# EAGLE board SDC project - Mask (EAGLE 9.1.3)
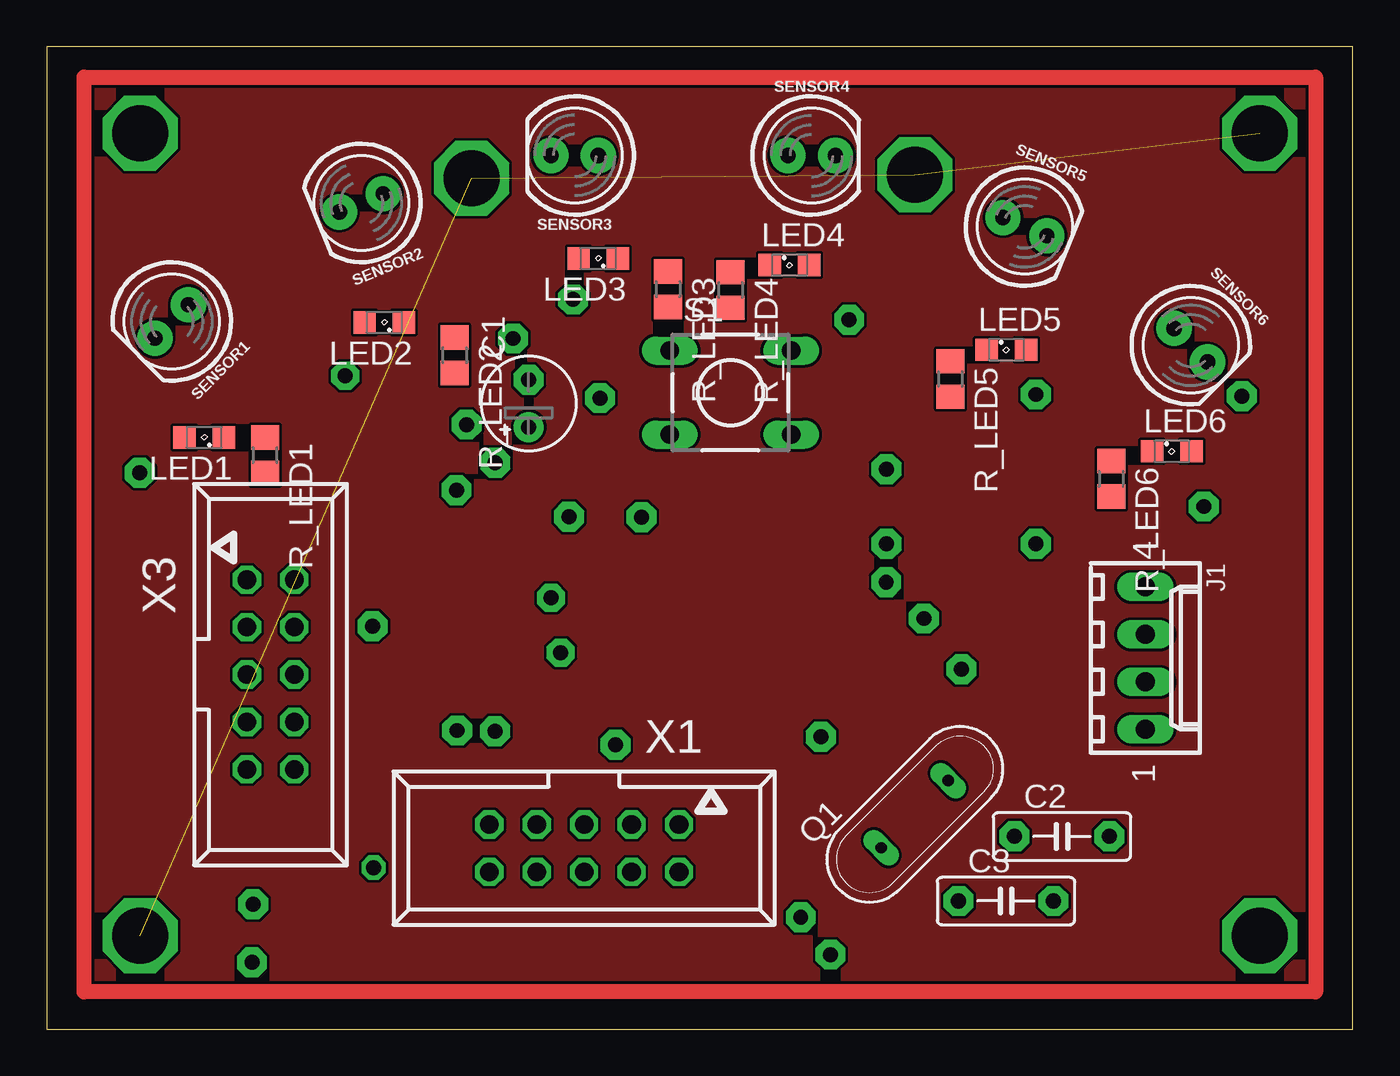
[diagram p0: board, top side]
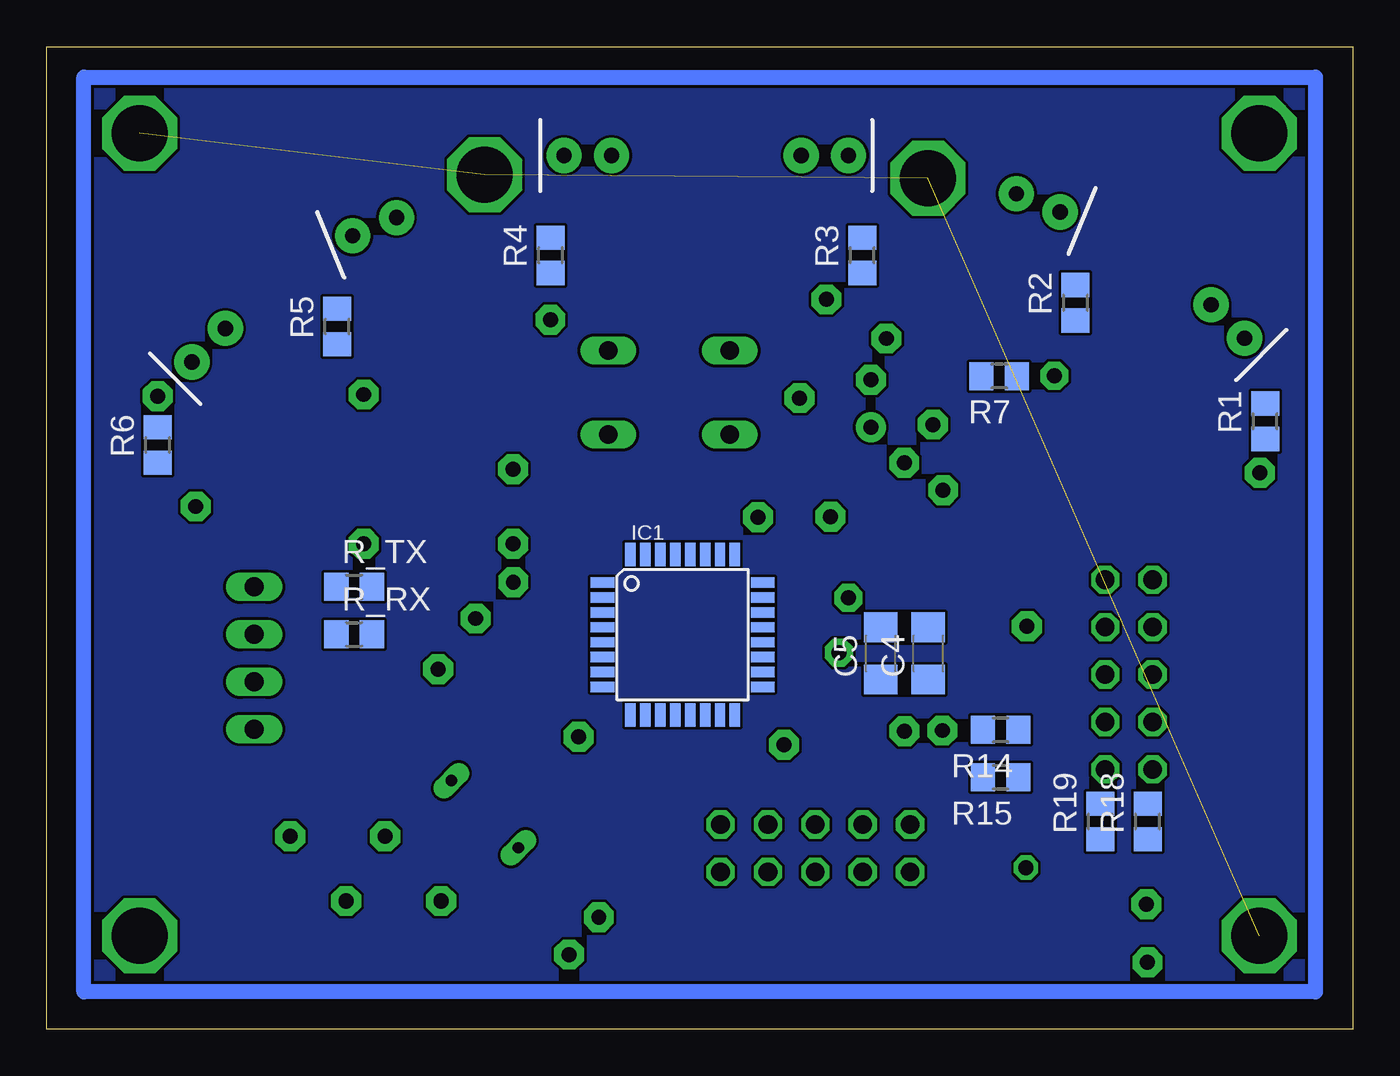
[diagram p1: board, bottom side, seen from below]

Size 69.99 x 52.63 mm. Coordinates in mm from the lower left corner, seen from the top.
Outline: 0,0 69.99,0 69.99,52.63 0,52.63 0,0
Copper layers (1*16): Top 0.035mm / dielectric 1.5mm / Bottom 0.035mm
Design rules "default": minimum track width 6mil, minimum drill 0.35mm, track to track 6mil, track to pad 6mil, pad to pad 6mil, via to via 6mil, smd to smd 6mil, copper to edge 40mil, drill to drill 6mil, minimum pad ring 10mil, minimum via ring 8mil, stop-mask expansion 4mil, vias tented up to drill 0mil, thermal gap 10mil

## Footprints (pad centres in the part's own frame; a part is rotated, then mirrored left to right if it is on the bottom)
E2,5-5 = drill 0.813 pad 1.6: + -1.27,0 | drill 0.813 pad 1.6 octagon: - 1.27,0
C5B2.5 = drill 0.813 pad 1.6 octagon: 1 -2.54,0; 2 2.54,0
C1206 = smd 1.6 x 1.8: 1 -1.4,0; 2 1.4,0
TQFP32-08 = smd 1.27 x 0.559: 1 -4.293,2.8; 2 -4.293,2; 3 -4.293,1.2; 4 -4.293,0.4; 5 -4.293,-0.4; 6 -4.293,-1.2; 7 -4.293,-2; 8 -4.293,-2.8; 17 4.293,-2.8; 18 4.293,-2; 19 4.293,-1.2; 20 4.293,-0.4; 21 4.293,0.4; 22 4.293,1.2; 23 4.293,2; 24 4.293,2.8 | smd 0.559 x 1.27: 9 -2.8,-4.293; 10 -2,-4.293; 11 -1.2,-4.293; 12 -0.4,-4.293; 13 0.4,-4.293; 14 1.2,-4.293; 15 2,-4.293; 16 2.8,-4.293; 25 2.8,4.293; 26 2,4.293; 27 1.2,4.293; 28 0.4,4.293; 29 -0.4,4.293; 30 -1.2,4.293; 31 -2,4.293; 32 -2.8,4.293
6410-04 = drill 1.016 long: 1 3.81,0; 2 1.27,0; 3 -1.27,0; 4 -3.81,0
SML0805 = smd 1.2 x 1.2: A 1.05,0; C -1.05,0
QS = drill 0.61 long: 1 -2.54,0; 2 2.54,0
R0805 = smd 1.3 x 1.5: 1 -0.95,0; 2 0.95,0
DTS-6 = drill 1 long: 1 -3.25,2.25; 2 3.25,2.25; 3 -3.25,-2.25; 4 3.25,-2.25
LED_5MM = drill 0.813 pad 1.88: A -1.27,0; K 1.27,0
057-010-1 = drill 1 octagon: 1 -5.08,-1.27; 2 -5.08,1.27; 3 -2.54,-1.27; 4 -2.54,1.27; 5 0,-1.27; 6 0,1.27; 7 2.54,-1.27; 8 2.54,1.27; 9 5.08,-1.27; 10 5.08,1.27

## Placement (x,y rotation side)
C1  [E2,5-5]  25.83,33.52 90 top
C2  [C5B2.5]  54.4,10.33 0 top
C3  [C5B2.5]  51.4,6.87 0 top
C4  [C1206]  22.75,20.13 90 bottom
C5  [C1206]  25.29,20.13 90 bottom
IC1  ATMEGA8-AU  [TQFP32-08]  35.91,21.13 0 bottom
J1  22-27-2041-04  [6410-04]  58.87,19.88 270 top
LED1  [SML0805]  8.44,31.7 180 top
LED2  [SML0805]  18.09,37.86 180 top
LED3  [SML0805]  29.55,41.29 180 top
LED4  [SML0805]  39.8,40.92 0 top
LED5  [SML0805]  51.43,36.4 0 top
LED6  [SML0805]  60.29,30.96 0 top
Q1  11.0592  [QS]  46.51,11.52 45 top
R1  [R0805]  4.7,32.56 90 bottom
R2  [R0805]  14.86,38.91 90 bottom
R3  [R0805]  26.29,41.45 90 bottom
R4  [R0805]  42.99,41.45 90 bottom
R5  [R0805]  54.42,37.64 90 bottom
R6  [R0805]  64.04,31.29 90 bottom
R7  10k  [R0805]  18.95,34.98 180 bottom
R14  100  [R0805]  18.87,16.03 180 bottom
R15  100  [R0805]  18.87,13.49 180 bottom
R18  10K  [R0805]  11,11.13 90 bottom
R19  10K  [R0805]  13.53,11.13 90 bottom
R_LED1  100  [R0805]  11.7,30.75 270 top
R_LED2  100  [R0805]  21.86,36.1 270 top
R_LED3  100  [R0805]  33.29,39.64 270 top
R_LED4  100  [R0805]  36.65,39.6 270 top
R_LED5  100  [R0805]  48.42,34.83 270 top
R_LED6  100  [R0805]  57.04,29.48 270 top
R_RX  100  [R0805]  53.52,21.15 0 bottom
R_TX  100  [R0805]  53.52,23.69 0 bottom
S1  DTS-6  [DTS-6]  36.64,34.1 0 top
SENSOR1  [LED_5MM]  6.7,37.91 225 top
SENSOR2  [LED_5MM]  16.86,44.26 202.5 top
SENSOR3  [LED_5MM]  28.29,46.8 180 top
SENSOR4  [LED_5MM]  40.99,46.8 0 top
SENSOR5  [LED_5MM]  52.42,42.99 337.5 top
SENSOR6  [LED_5MM]  61.31,36.64 315 top
X1  057-010-1  [057-010-1]  28.8,9.7 180 top
X3  057-010-1  [057-010-1]  12,19 270 top

## Library data of the parts
C1 C4 C5 = rcl; SPICEPREFIX: C
C2 C3 = capacitor-wima
IC1 = atmega8
J1 = con-molex; MF: MOLEX; OC_FARNELL: unknown; OC_NEWARK: unknown
LED1-LED6 = led
Q1 = special
R1-R7 R14 R15 R18 R19 R_LED1-R_LED6 R_RX R_TX = rcl; SPICEPREFIX: R
S1 = switch-tact
SENSOR1-SENSOR6 = SparkFun-LED
X1 X3 = con-panduit; OC_FARNELL: unknown; OC_NEWARK: unknown

## Tracks (layer width: path | path; a pad name or v marks a point on that pad's centre or on a via)
ADC7  (via drill 0.8 pad 1.6)
  other vias: 53,26
ADC8  (via drill 0.8 pad 1.6)
  other vias: 64.04,33.91
D  (via drill 3 pad 3.5)  (3 unrouted)
  other vias: 65,48 22.76,45.59 46.53,45.78 5,5
N$1  (via drill 0.8 pad 1.6)
  other vias: 45,30
N$3
  Top 0.813: 2,51 68,51 68,2 2,2 2,51
N$4  (via drill 3 pad 3.5)
  other vias: 5,48
N$6  (via drill 3 pad 3.5)
  other vias: 65,5
N$7  (via drill 0.8 pad 1.6)
  other vias: 21.96,28.88
N$10  (via drill 0.8 pad 1.6)
  other vias: 24.04,30.34
N$11
  Bottom 0.813: 2,51 2,2 68,2 68,51 2,51
N$14  (via drill 0.8 pad 1.6)
  other vias: 47,22
N$15  (via drill 0.8 pad 1.6)
  other vias: 49.02,19.29
N$16  (via drill 0.8 pad 1.6)
  other vias: 41.48,15.66
N$17  (via drill 0.8 pad 1.6)
  other vias: 42,4
N$18  (via drill 0.8 pad 1.6)
  other vias: 40.4,6
S$1  (via drill 0.8 pad 1.6)
  other vias: 25,37
S$2  (via drill 0.8 pad 1.6)
  other vias: 27.98,27.45
S$3  (via drill 0.8 pad 1.6)
  other vias: 29.65,33.81
S$4  (via drill 0.8 pad 1.6)
  other vias: 4.99,29.8
S$6  (via drill 0.8 pad 1.6)
  other vias: 31.88,27.43
S$7  (via drill 0.8 pad 1.5)
  other vias: 16,35
S$10  (via drill 0.8 pad 1.6)
  other vias: 28.21,39.09
S$13  (via drill 0.8 pad 1.6)
  other vias: 17.46,21.58
S$14  (via drill 0.8 pad 1.6)
  other vias: 43,38
S$15  (via drill 0.8 pad 1.6)
  other vias: 62,28
S$16  (via drill 0.8 pad 1.3)
  other vias: 17.52,8.66
S$17  (via drill 0.8 pad 1.6)
  other vias: 30.48,15.23
S$18  (via drill 0.8 pad 1.6)
  other vias: 22.49,32.39
S$19  (via drill 0.8 pad 1.6)
  other vias: 45,26
S$20  (via drill 0.8 pad 1.6)
  other vias: 22,16
S$21  (via drill 0.8 pad 1.6)
  other vias: 24.02,15.96
S$22  (via drill 0.8 pad 1.6)
  other vias: 44.99,23.95
S$27  (via drill 0.8 pad 1.6)
  other vias: 11,3.58
S$33  (via drill 0.8 pad 1.5)
  other vias: 27.55,20.18
S$36  (via drill 0.8 pad 1.5)
  other vias: 27.03,23.11
S$38  (via drill 0.8 pad 1.6)
  other vias: 11.06,6.7
VCC  (via drill 0.8 pad 1.6)
  other vias: 53,34
X
  pour Bottom: 2,51 68,51 68,2 2,2
XX
  pour Top: 2,51 68,51 68,2 2,2

## Text on the board
tSilk: sensor 3 | sensor 4 | sensor 2 | sensor 5 | Sensor 1 | sensor 6 | Fire | Reset | Sensor | Smart Disaster | TX | GND | Companion | RX | VCC | VCC | GND | MISO | SCK | RESET | MOSI | I2C Com | SERIAL Com | SCL | 11.0592 | SDA | Downloader